# Altium PCB Board_Senosrs(BMI088+SPL06+AK8975).PcbDoc
Units mil, origin at the board's own origin, x right, y up, seen from the top; angles counter-clockwise.
Board outline 1165.35 x 771.65 mil, 2 copper layers (Top Layer, Bottom Layer), stack 65.792 mil thick; 25 components, 16 nets, 100 pads, 35 vias.
Unrouted connection lines stored in the file: 8.
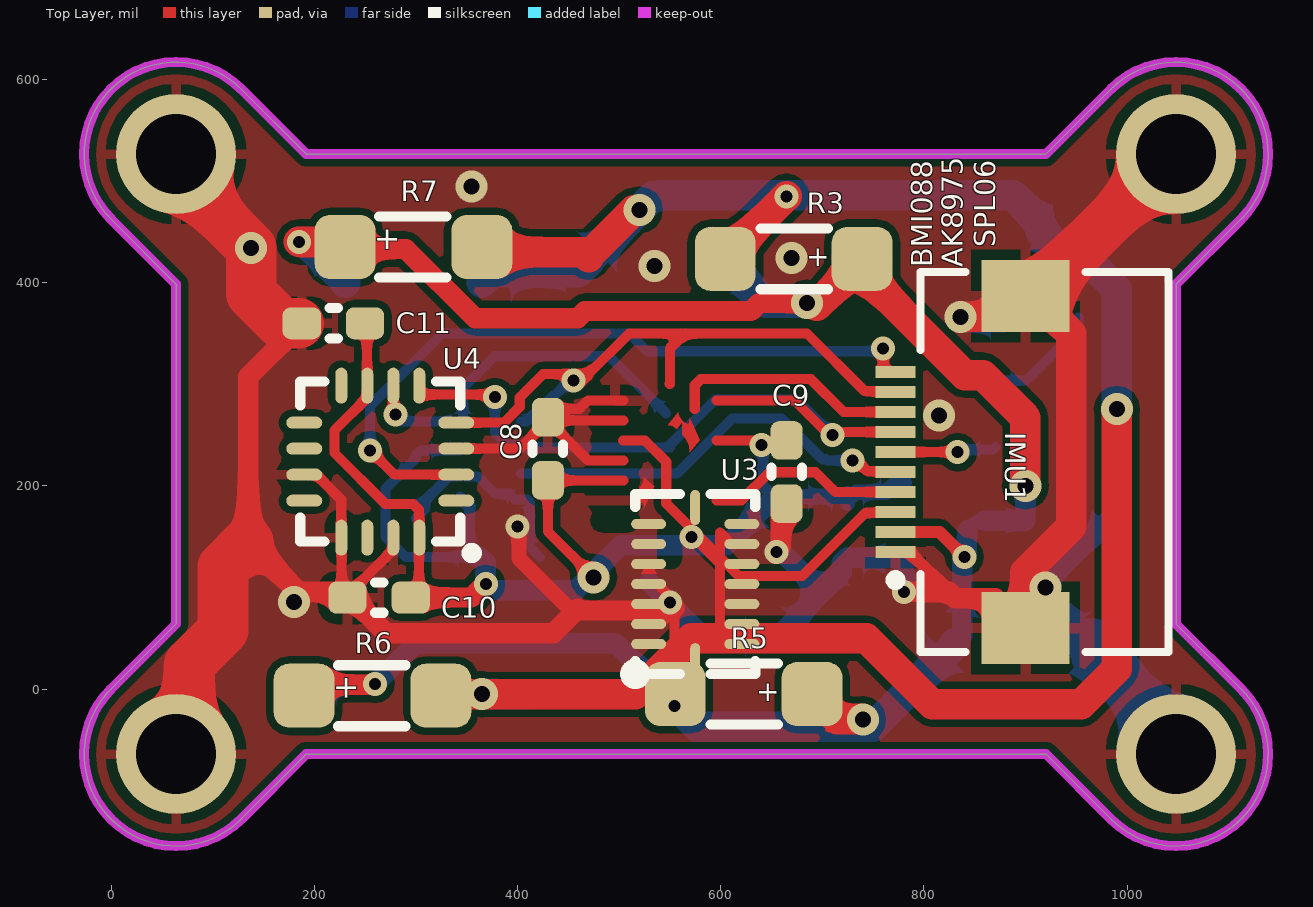
[diagram p0: Top Layer view]
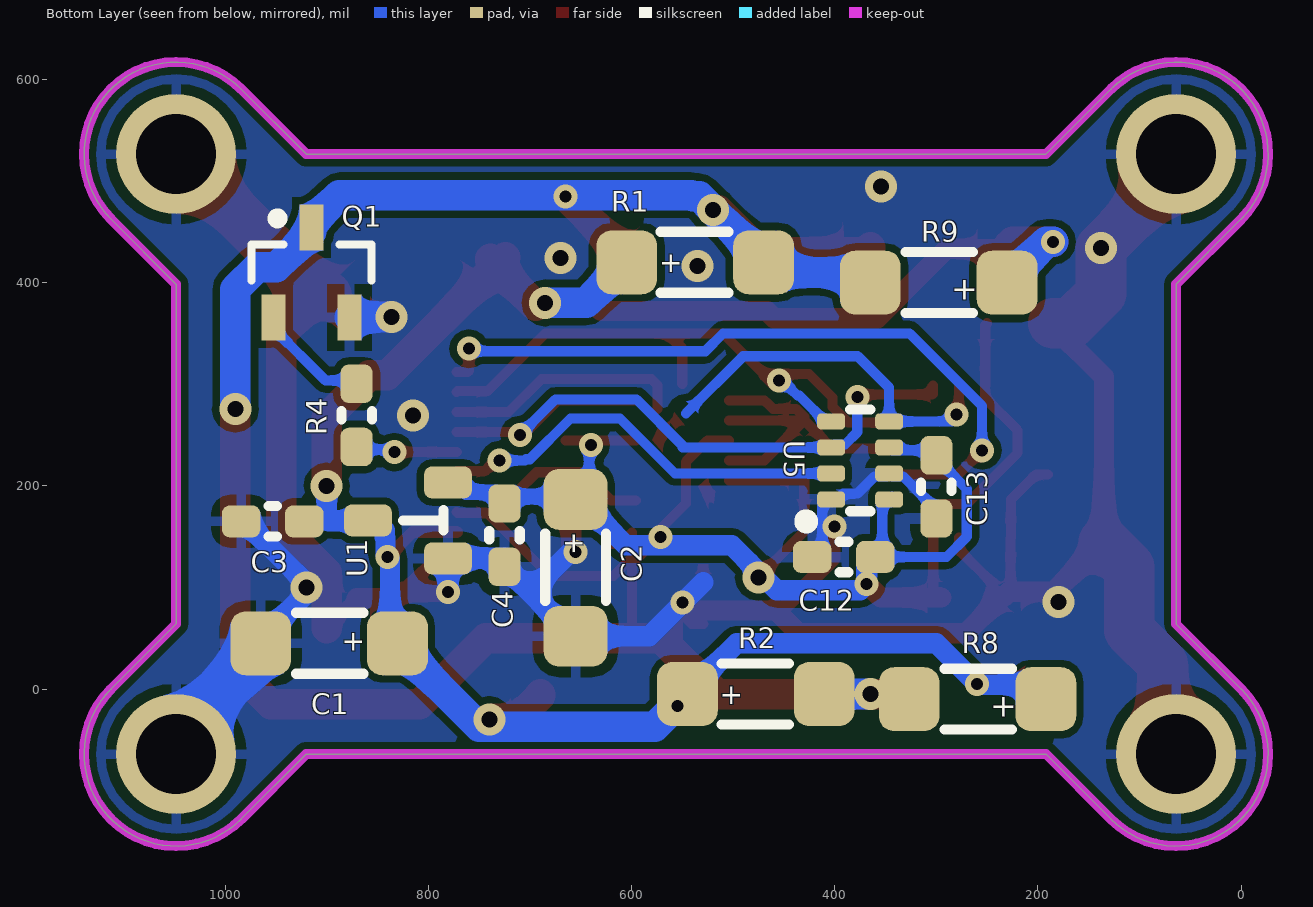
[diagram p1: Bottom Layer view, seen from below]

## Layer stack, top to bottom
Top Solder: solder mask 0.4, Solder Resist, Dk 3.5
Top Layer: signal copper 1.4
Dielectric 1: dielectric 62.9921, FR-4, Dk 4.8
Bottom Layer: signal copper 1.4
Bottom Solder: solder mask 0.4, Solder Resist, Dk 3.5

## Board outline
0,0 64.03,64.03 64.03,398.46 0,462.49 cw(c64.03,526.52) 128.06,590.55 192.09,526.52 920.22,526.52 984.25,590.55 cw(c1048.28,526.52) 1112.31,462.49 1048.28,398.46 1048.28,64.03 1112.31,0 cw(c1048.28,-64.03) 984.25,-128.06 920.22,-64.03 192.09,-64.03 128.06,-128.06 cw(c64.03,-64.03)

## Design rules (kind name [scope] priority, off if disabled: settings)
Clearance [All] p1: gap=7 ignorepadtopadclearanceinfootprint=FALSE
PolygonConnect PolygonConnect_Via [All vs isvia] p1: connectstyle=Direct reliefconductorwidth=10 reliefentries=4 polygonreliefangle="90 Angle" airgapwidth=10
PolygonConnect [All] p2: connectstyle=Relief reliefconductorwidth=10 reliefentries=4 polygonreliefangle="90 Angle" airgapwidth=10
RoutingVias [All] p1: holewidth=11.81 width=23.62 viastyle="Through Hole" minholewidth=11.81 minwidth=23.62 maxholewidth=236.22 maxwidth=393.7
SolderMaskExpansion [All] p1: expansion=4
Width [All] p1: maxlimit=100 minlimit=8 preferedwidth=10
30 further rules are at their usual default settings.

## Classes and differential pairs
component class SPL06: C12 C13 U5
component class Board_Sensors: C1 C2 C3 C4 IMU1 Q1 R1 R2 R3 R4 R5 R6 R7 R8 R9 U1
component class BMI088: C8 C9 U3
component class AK8975: C10 C11 U4

## Components (designator, comment, footprint, x,y, rotation, side; value= is the part's Value field where it differs from the comment)
C1 "CapTan" 1206_P 830.35,45 r0 bottom value=47uF
C2 "CapTan" 1206_P 655,186.61 r270 bottom value=47uf
C3 "Cap" 0603 984.25,165 r180 bottom value=0.1uF
C4 "Cap" 0603 725,120.37 r90 bottom value=0.1uF
C8 "Cap" 0603 430,205.39 r90 top value=0.1uF
C9 "Cap" 0603 665,244.68 r270 top value=0.1uF
C10 "Cap" 0603 295,90 r180 top value=0.1uF
C11 "Cap" 0603 250,360 r180 top value=0.1uF
C12 "Cap" 0603 360,130 r0 bottom value=0.1uF
C13 "Cap" 0603 300,230 r270 bottom value=0.1uF
IMU1 "Header 10" "FPC 0.5mm 10pin" 771.06,107.24 r90 top
Q1 "NPN" SOT23_N 915,410 r90 bottom
R1 "Res2" 1206_P 604.65,420 r180 bottom value=50R
R2 "Res2" 1206_P 545,-5 r180 bottom value=50R
R3 "Res2" 1206_P 739.29,423.43 r180 top value=50R
R4 "Res2" 0603 870.57,300.47 r270 bottom value=1k
R5 "Res2" 1206_P 690,-5 r180 top value=50R
R6 "Res2" 1206_P 190,-6.57 r0 top value=50R
R7 "Res2" 1206_P 230.35,435 r0 top value=50R
R8 "Res2" 1206_P 192.09,-10 r0 bottom value=50R
R9 "Res2" 1206_P 230.35,400 r0 bottom value=50R
U1 "XC6206" SOT23 820,165.95 r90 bottom
U3 "BMI088" BMI088 575,103.3 r90 top
U4 "AK8975" AK8975 265,223.82 r90 top
U5 "SPL06" SPL06 375,225 r0 bottom

## Footprints (in the part's own frame and the unit in brackets; to place one, negate y for a bottom-side part, rotate by r counter-clockwise, add the part's x,y. Pads: shape width x height; smd on the part's side, far side on the other; paste and mask are expansions set on the pad)
0603 [mm]
  rrect50% 0.96x0.8 smd: 1(0,0) 2(1.58,0)
  silkscreen extent 0.68,-0.38 0.89,0.38, body extent -0.1,-0.38 1.68,0.38, height 1
1206_P [mm]
  rrect50% 1.52x1.6 smd: 1(0,0) 2(3.42,0)
  silkscreen extent 0.85,-0.76 2.54,0.76, body extent 0.06,-0.89 3.36,0.89, height 1.2
AK8975 [mm]
  oval 0.3x0.9 smd: 1(-0.975,-1.9) 2(-0.325,-1.9) 3(0.325,-1.9) 4(0.975,-1.9) 9(0.975,1.9) 10(0.325,1.9) 11(-0.325,1.9) 12(-0.975,1.9)
  oval 0.9x0.3 smd: 5(1.9,-0.975) 6(1.9,-0.325) 7(1.9,0.325) 8(1.9,0.975) 13(-1.9,0.975) 14(-1.9,0.325) 15(-1.9,-0.325) 16(-1.9,-0.975)
  silkscreen extent -2.41,-2.41 2,2, body extent -2,-2 2,2, height 0.75
BMI088 [mm]
  oval 0.25x0.875 smd: 1(-1.5,1.165) 2(-1,1.165) 3(-0.5,1.165) 4(0,1.165) 5(0.5,1.165) 6(1,1.165) 7(1.5,1.165) 9(1.5,-1.165) 10(1,-1.165) 11(0.5,-1.165) 12(0,-1.165) 13(-0.5,-1.165) 14(-1,-1.165) 15(-1.5,-1.165)
  oval 0.875x0.25 smd: 8(1.915,0) 16(-1.915,0)
  silkscreen extent -2.37,-1.5 2.25,1.62, body extent -2.25,-1.5 2.25,1.5, height 0.95
"FPC 0.5mm 10pin" [mm]
  rect 0.3x1 smd: 1(0.7,-0.025) 2(1.2,-0.025) 3(1.7,-0.025) 4(2.2,-0.025) 5(2.7,-0.025) 6(3.2,-0.025) 7(3.7,-0.025) 8(4.2,-0.025) 9(4.7,-0.025) 10(5.2,-0.025)
  rect 1.8x2.2 smd: 11(-1.2,-3.275) 12(7.1,-3.275)
  silkscreen extent -1.8,-6.85 7.7,0.1, body extent -2.29,-5.09 8.14,0.02, height 2
SOT23 [mm]
  rrect50% 0.8x1.2 smd: 1(-0.95,-1) 2(0.95,-1) 3(0,1)
  silkscreen extent -0.25,-0.89 0.25,0.13, body extent -1.5,-1.38 1.5,1.12, height 1.1
SOT23_N [mm] "SOT23, 3-Leads, Body 2.9x1.3mm, Pitch 0.95mm, Lead Span 2.3mm - Reverse Pinning, IPC Medium Density"
  rect 1.15x0.6 smd: 1(1.125,0) 2(-1.125,-0.95) 3(-1.125,0.95)
  silkscreen extent -0.2,-1.5 1.47,1.5, body extent -0.7,-1.5 0.7,1.5, height 1.1
SPL06 [mm]
  rrect50% 0.7x0.4 smd: 1(0.725,0.975) 2(0.725,0.325) 3(0.725,-0.325) 4(0.725,-0.975) 5(-0.725,-0.975) 6(-0.725,-0.325) 7(-0.725,0.325) 8(-0.725,0.975)
  silkscreen extent -0.25,-1.27 1.4,1.57, body extent -1,-1.25 1,1.25, height 0.95

## Part data
C1 C2: library part "Cap Pol2", "Polarized Capacitor (Axial)", LatestRevisionDate=17-Jul-2002, LatestRevisionNote="Re-released for DXP Platform.", PackageDescription="Polarized Capacitor; 2 Leads", PackageReference=POLAR0.8, Published=8-Jun-2000, Publisher="Altium Limited"
C3 C4 C8 C9 C10 C11 C12 C13: "Capacitor", LatestRevisionDate=17-Jul-2002, LatestRevisionNote="Re-released for DXP Platform.", PackageDescription="Radial Cap, Thru-Hole; 2 Leads; 0.3 in Pin Spacing", PackageReference=RAD-0.3, Published=8-Jun-2000, Publisher="Altium Limited"
IMU1: "Header, 10-Pin", LatestRevisionDate=17-Jul-2002, LatestRevisionNote="Re-released for DXP Platform.", Publisher="Altium Limited"
Q1: "NPN Bipolar Transistor", Code_JEDEC=TO-226-AA, LatestRevisionDate=17-Jul-2002, LatestRevisionNote="Re-released for DXP Platform.", PackageDescription="TO, Flat Index; 3 In-Line, Axial Leads; Body Dia. 4.8mm; Leads 0.55 x 0.51 mm (max)", PackageReference=TO-226-AA, Published=8-Jun-2000, Publisher="Altium Limited"
R1 R2 R3 R4 R5 R6 R7 R8 R9: "Resistor", LatestRevisionDate=17-Jul-2002, LatestRevisionNote="Re-released for DXP Platform.", PackageDescription="Axial Device, Thru-Hole; 2 Leads; 0.4 in Pin Spacing", PackageReference=AXIAL-0.4, Published=8-Jun-2000, Publisher="Altium Limited"

## Free pads (board coordinates)
  round 118.11 hole 78.74: 0(64.03,-64.03) 0(64.03,526.52) 0(1048.28,-64.03) 0(1048.28,526.52)

## Via types
v1: diameter 23.62, hole 11.81, Top Layer to Bottom Layer, 20 vias
v2: diameter 31.5, hole 15.75, Top Layer to Bottom Layer, 15 vias

## Nets (pads, with @x,y where several pads share a name; then routed paths per layer and width w, separated by ;. In a path a pad name is that pad's centre, name@x,y a point inside that pad or via, vN(x,y) a via of type N, cw(c..) or ccw(c..) an arc to the next point about the centre after c; other vN are vias at no path point)
3.3V: C2.1 C4.2 C8.1 C9.1 C10.1 C11.1 C12.1 C13.1 U1.2 U3.3 U3.11 U4.7 U4.16 U5.6 U5.8 | length 1547.5
  Top Layer w10: C11.1 251.86,358.14 251.86,298.97 U4.7 252.2,286.81 220,254.61 220,232.32 270.29,182.03 297.53,182.03 303.04,176.51 303.04,149.36 U4.16 303.04,148.67 303.04,98.04 C10.1 ; v2(475,110) 430,155 C8.1 C8.1 504.09,205.35 504.13,205.31 ; 595.87,244.69 640,244.69 C9.1
  Top Layer w20: C10.1 354.62,90 367.92,103.3 v1(368.9,103.3)
  Bottom Layer w10: U5.8@343.58,189.49 U5.8 350.35,186.61 353.23,183.74 353.23,136.77 C12.1 290,130 270,150 270,196.85 300,226.85 C13.1 304.92,234.92 343.58,234.92 U5.6 ; v1(640,240) 641.73,238.27 641.73,199.88 C2.1
  Bottom Layer w15: C2.1 657.8,189.41 722.2,189.41 C4.2@725,192.2 ; C4.2 725,185.52 733.22,193.74 762.95,193.74 772.55,203.35 U1.2 U1.2@775.06,197.78
  Bottom Layer w20: C12.1 363.15,130 368.9,124.25 v1(368.9,103.3) 374.95,97.25 457.25,97.25 501.47,141.47 605.6,141.47 650.74,186.61 C2.1
5V: C1.1 C3.2 IMU1.2 R1.1 R2.1 R3.1 R5.1 R6.1 R7.1 R8.1 R9.1 U1.3 | length 2236.2
  Top Layer w12: IMU1.2 815.32,154.49 839.8,130 v1(840,130)
  Top Layer w20: R6.1 200.88,4.31 259.31,4.31 v1(260,5) ; R7.1 232.32,433.03 290.28,433.03 358.3,365 459.41,365 466.41,372 629.92,372 637.92,380 v2(685,380)
  Top Layer w30: v1(185,440) 225.35,440 R7.1 ; R5.1 690,-6.57 704.92,-21.5 706.5,-21.5 714.71,-29.71 739.71,-29.71 v2(740,-30) ; v2@694.44,377 R3.1@733.37,415.93 ; R3.1@724.29,425 R3.1@733.37,415.93 ; R3.1 739.29,421.85 R3.1@733.37,415.93 ; v2(900,199.88) 900,267.2 858.25,308.95 840.34,308.95 R3.1@733.37,415.93
  Bottom Layer w12: C1.1 C1.1@837.78,52.42 ; v1@837.78,127.78 v1(840,130) v1@842.22,132.22 ; 842.22,148.8 842.9,149.48 ; U1.3@842.9,156.34 852.51,165.95 U1.3
  Bottom Layer w20: R8.1 206.4,4.31 259.31,4.31 v1(260,5) 300,45 496.57,45 545,-3.43 R2.1 ; C1.1@837.78,52.42 v1@837.78,127.78 ; v1@842.22,132.22 842.22,148.8 ; 842.9,149.48 U1.3@842.9,156.34 ; U1.3 859.84,165.47 900,165.47 v2(900,199.88)
  Bottom Layer w30: v1(185,440) 191.93,440 230.35,401.57 R9.1 ; R2.1 545,-6.57 559.92,-21.5 561.5,-21.5 577.03,-37.03 749.9,-37.03 830.35,43.43 C1.1 ; R1.1@609.36,424.71 R1.1 604.65,418.43 619.57,403.5 621.14,403.5 644.36,380.29 684.71,380.29 v2(685,380)
GND: C1.2 C2.2 C3.1 C4.1 C8.2 C9.2 C10.2 C11.2 C12.2 C13.2 IMU1.1 IMU1.11 IMU1.12 pad.0 Q1.2 U1.1 U3.2 U3.4 U3.6 U3.7 U4.3 U4.11 U4.13 U4.15 U5.1 U5.7 | length 3884.3
  Top Layer w10: U4.11 202.01,211.02 226.61,186.42 U4.13 226.96,148.67 C10.2@226.96,95.83 ; C10.2@234.39,90 244.92,100.53 244.92,104.33 277.8,137.2 U4.15 ; U4.3 402.17,236.61 C8.2@430,264.45 ; 504.13,225 504.06,225.08 469.37,225.08 C8.2@430,264.45 ; 504.13,264.37 504.06,264.45 433.15,264.45 C8.2 ; 504.13,284.05 504.06,283.98 469.33,283.98 466.8,281.45 466.44,281.45 460.75,275.76 438.16,275.76 C8.2 ; U3.2 529.21,64.01 540.71,64.01 v1@554.52,77.82 ; U3.4 537.81,103.3 554.52,86.59 v1@554.52,77.82 ; v1(554.52,-16.7) v1@554.52,77.82 ; C8.2@430,264.45 C8.2
  Top Layer w12: IMU1.1 785.64,134.8 824.81,95.63 ; IMU1.11@870.57,89.43 IMU1.11
  Top Layer w15: v1(400,160) 401.65,158.35 401.65,128.35 450.25,79.75 459.47,79.75
  Top Layer w20: C11.2 184.65,360 178.9,354.25 178.9,351.1 135,307.2 135,145 184.25,95.75 228.64,95.75 234.39,90 235.94,90 270.94,55 435.25,55 459.47,79.22 461.44,77.25 542.52,77.25 544.57,79.31 554.31,79.31 v1@554.75,79.75 ; v1(655,135) 655,135.98 659.25,140.23 659.25,176.73 C9.2 ; v1(780.63,95.63) 824.81,95.63 831.01,89.43 IMU1.11@870.57,89.43
  Top Layer w30: v2(836.34,366.34) 879.57,366.34 IMU1.12 ; IMU1.11 900,115 945,160 945,349.65 IMU1.12@907.87,386.77
  Top Layer w50: pad.0@64.03,-64.03 77.06,-51 77.06,24.74 110.1,57.78 110.1,120.1 135,145 ; pad.0@64.03,526.52 64.03,508.09 v2(138,434.12) 138,389.29 167.29,360 C11.2@184.65,360 ; IMU1.12 907.87,386.77 1047.62,526.52 pad.0@1048.28,526.52
  Bottom Layer w10: C13.2 308.97,176.77 308.97,185.45 332.86,209.33 343.58,209.33 U5.7 349.33,209.33 360.76,209.33 377.76,192.33 391.92,192.33 397.64,186.61 U5.1 409.45,186.61 412.32,183.74 412.32,161.81 401.81,161.81 v1(400,160) ; 412.32,160 412.32,139.88 C12.2
  Bottom Layer w20: 529.52,105 582.55,51.97 C2.2 656.57,51.97 699.8,95.2 ; v1(655,135) 660,135 699.8,95.2 ; v1(780.63,95.63) U1.1 779.9,129.27 725.73,129.27 725,130 719.25,124.25 719.25,114.65 699.8,95.2 ; C1.2 965,49.26 922.2,92.06 922.2,97.8 v2(920,100) 922.2,102.2 922.2,106.1 981.1,165 C3.1
  Bottom Layer w30: v2(836.34,366.34) 836.62,366.05 877.26,366.05 Q1.2
  Bottom Layer w50: C1.2 969.92,40.08 969.92,32.76 1048.28,-45.6 pad.0@1048.28,-64.03
  other v1: 550,85
  other v2: 180,85.58 815,269.37 535,416.22 670,424.14 354.62,494.77
NetQ1_1: Q1.1 R1.2 R2.2 R3.2 R5.2 R6.2 R7.2 R8.2 R9.2 | length 2099.1
  Top Layer w30: v2(365,-5) 355.57,-5 355.29,-5.29 515.95,-5.29 571.23,50 743.43,50 808.43,-15 955,-15 990,20 v2(990,275.48) ; R7.2 370,430 465,430 470,425 470,426.57 514.71,471.29 519.71,471.29 v2(520,471.57) ; R3.2 604.65,425 664.65,485 v1(665,485)
  Bottom Layer w30: v2(365,-5) R2.2 ; R9.2 375,410 460,410 R1.2 470,421.57 v2(520,471.57) 533.43,485 540,485 541.11,486.11 887.63,486.11 915,458.74 Q1.1 915,449.84 949.67,415.17 968.5,415.17 990,393.67 v2(990,275.48)
NetQ1_2: Q1.3 R4.1 | length 115.2
  Bottom Layer w10: R4.1 873.89,303.8 901.32,303.8 952.4,354.88 Q1.3
NetU4_10: U4.10
Sensor1_CS: IMU1.3 U3.5 | length 373.3
  Top Layer w10: 504.13,244.68 525.39,244.68 546.52,223.56 546.52,182.58 617.91,111.19 680.23,111.19 742.31,173.27 771.14,173.27 IMU1.3
Sensor1_INT: U3.16
Sensor2_CS: IMU1.4 U3.14 | length 195.8
  Top Layer w10: 595.87,185.63 595.94,185.71 620.37,185.71 648.04,213.38 693.39,213.38 712.91,193.86 IMU1.4
Sensor2_INT: U3.12
Sensor3_CS: IMU1.5 U5.2 | length 412.8
  Top Layer w10: v1(730,225) 733.69,225 744.24,214.45 771.14,214.45 IMU1.5
  Bottom Layer w10: U5.2 557.2,212.2 611.33,266.33 660,266.33 700.14,226.19 703.81,226.19 705,225 v1(730,225)
Sensor4_CS: IMU1.10 U4.2 | length 715.8
  Top Layer w10: v1(255,235) 278.98,211.02 U4.2 ; v1(760,335) 760,312.87 760.91,311.97 IMU1.10
  Bottom Layer w10: v1(255,235) 255,278.67 326.33,350 510,350 527.5,332.5 757.5,332.5 v1(760,335)
SPI_SCLK: IMU1.9 U3.8 U4.4 U5.4 | length 632.5
  Top Layer w10: U4.4@351.61,262.21 386.72,262.21 402.25,277.74 402.25,286.85 425.4,310 469.92,310 ; v1(455,303.69) 460,298.69 469.92,308.61 469.92,310 ; 550,300.39 550.08,300.47 550.08,335.08 565,350 ; IMU1.9 771.14,293.19 741.81,293.19 685,350 565,350 ; 469.92,310 509.92,350 565,350
  Bottom Layer w10: U5.4 409.45,263.39 435,288.94 436.56,288.94 451.31,303.69 v1(455,303.69)
SPI_SDI: IMU1.7 U3.9 U4.5 U5.3 | length 692.2
  Top Layer w10: U4.5 303.39,290.68 304.22,289.84 375.16,289.84 v1(377.76,287.24) ; 595.87,284.06 672.63,284.06 703.78,252.91 710,252.91 v1@720,252.91 ; v1(710,250) 717.09,250 v1@720,252.91 ; IMU1.7 v1@720,252.91
  Bottom Layer w10: v1(377.76,287.24) 377.76,252.85 389.94,240.67 400.67,240.67 U5.3 550,237.8 550,240 595,285 675,285 v1(710,250)
SPI_SDO: IMU1.8 U3.10 U3.15 U4.6 U5.5 | length 802
  Top Layer w10: U4.6 277.8,278.29 286.09,270 v1(280,270) ; v1(571.34,149.64) 573.18,149.64 599.52,123.3 ; 574.52,275.48 574.52,299.14 580.37,305 688.67,305 721.08,272.6 IMU1.8 ; U3.15 612.19,44.25 599.52,56.92 599.52,123.3 ; U3.10 620.79,142.75 610.55,142.75 599.52,153.79 599.52,123.3
  Bottom Layer w10: v1(280,270) 286.61,263.39 U5.5 346.46,296.46 377.5,327.5 490.18,327.5 546.34,271.34
temp: IMU1.6 R4.2 | length 100.6
  Top Layer w10: IMU1.6 v1(833.31,233.23)
  Bottom Layer w10: v1(833.31,233.23) 835.83,235.75 868.05,235.75 R4.2
pads on no net: U3.1 U3.13 U4.1 U4.8 U4.9 U4.12 U4.14

## Polygon pours and split planes (outlines as drawn)
GND on Bottom Layer "GND_L02_P004" (solid, remove dead copper, pour order 4): -90,725 -110,705 -110,-190 1225,-190 1180,-145 1180,715
GND on Top Layer "GND_L01_P008" (solid, remove dead copper, pour order 8): -65,695 -130,630 -130,-270 1160,-270 1225,-205 1225,675

## Keep-outs
Keep-Out Layer:
  the board outline again, w10

## Silkscreen, mask and mechanical layers (free items; w line width, h text height)
Top Overlay:
  text "SPL06" at 877.26,435 h35 r90
  text "BMI088" at 815,415.17 h35 r90
  text "AK8975" at 845,415 h35 r90

## Text inside footprints (layer, text, board x,y; h text height)
C1: Bottom Overlay "+" at 885.35,55 h20 r180
C2: Bottom Overlay "+" at 665,131.61 h20 r90
R1: Bottom Overlay "+" at 549.65,410 h20
R2: Bottom Overlay "+" at 490,-15 h20
R3: Top Overlay "+" at 684.29,433.43 h20 r180
R5: Top Overlay "+" at 635,5 h20 r180
R6: Top Overlay "+" at 245,-16.57 h39.37
R7: Top Overlay "+" at 285.35,425 h39.37
R8: Bottom Overlay "+" at 247.09,0 h39.37 r180
R9: Bottom Overlay "+" at 285.35,410 h39.37 r180